# EAGLE board source_eagle (EAGLE 9.5.1)
REV: B
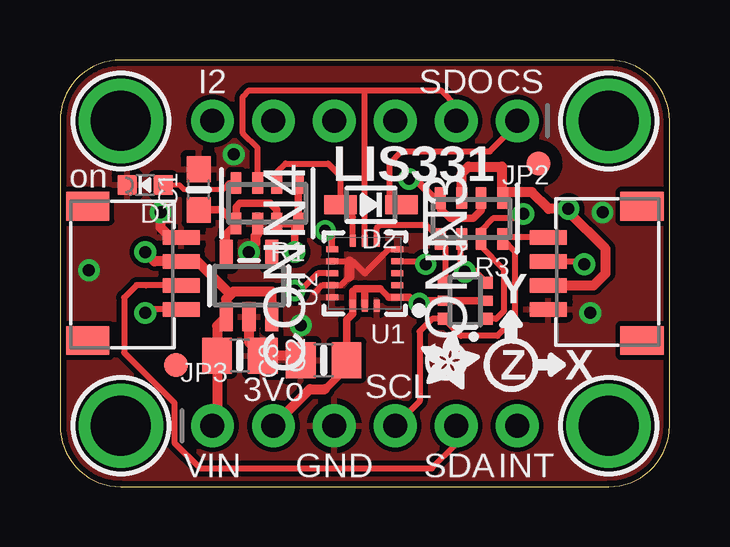
[diagram p0: board, top side]
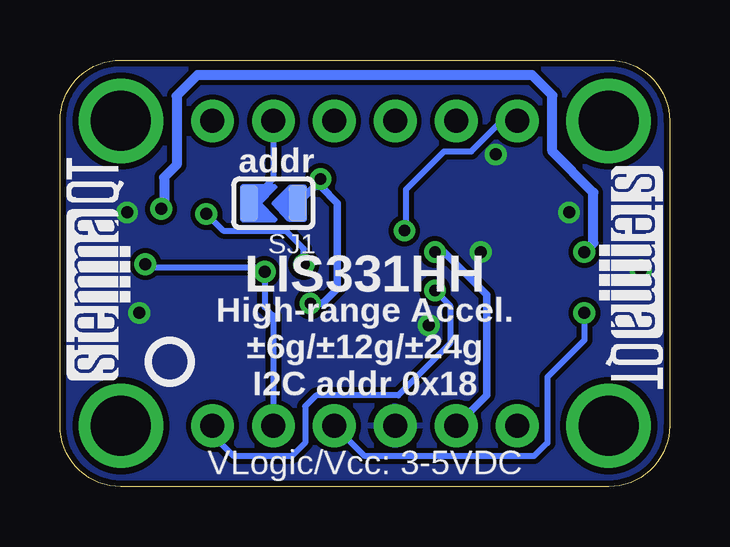
[diagram p1: board, bottom side, seen from below]

Size 25.4 x 17.78 mm. Coordinates in mm from the lower left corner, seen from the top.
Outline: 0,15.24 0,2.54 arc90 2.54,0 22.86,0 arc90 25.4,2.54 25.4,15.24 arc90 22.86,17.78 2.54,17.78 arc90 0,15.24
Copper layers (1*16): Top 0.035mm / dielectric 1.5mm / Bottom 0.035mm
Design rules "adafruit *": minimum track width 8mil, minimum drill 15.5mil, track to track 8mil, track to pad 8mil, pad to pad 8mil, via to via 8mil, smd to smd 8mil, copper to edge 10mil, drill to drill 8mil, minimum pad ring 10mil, minimum via ring 8mil, stop-mask expansion 2mil, vias tented up to drill 20mil, thermal gap 10mil
Net classes: 1 highpower: width 0.406 mm, drill 0.483 mm; 2 lowpower: width 0.305 mm, drill 0.483 mm

## Footprints (pad centres in the part's own frame; a part is rotated, then mirrored left to right if it is on the bottom)
0603-NO = smd 1.075 x 1: 1 -0.85,0; 2 0.85,0
0805-NO = smd 1.24 x 1.5: 1 -0.95,0; 2 0.95,0
JST_SH4 = smd 0.6 x 1.55: 1 -1.5,2.514; 2 -0.5,2.514; 3 0.5,2.514; 4 1.5,2.514 | smd 1.2 x 1.8: MT1 -2.8,-1.386; MT2 2.8,-1.386
CHIPLED_0603_NOOUTLINE = smd 0.8 x 0.8: A 0,-0.75; C 0,0.75
SOD-323 = smd 1.35 x 0.8: A 1.27,0; C -1.27,0
FIDUCIAL_1MM = smd 1 x 1: 1 0,0
1X06_ROUND_70 = drill 1 pad 1.778: 1 -6.35,0; 2 -3.81,0; 3 -1.27,0; 4 1.27,0; 5 3.81,0; 6 6.35,0
SOT363 = smd 0.5 x 0.5: 1 -0.75,-0.9; 3 0.75,-0.9; 4 0.75,0.9; 6 -0.75,0.9 | smd 0.4 x 0.5: 2 0,-0.9; 5 0,0.9
RESPACK_4X0603 = smd 0.45 x 0.9: 1 -1.3,-0.85; 2 -0.4,-0.85; 3 0.4,-0.85; 4 1.3,-0.85; 5 1.3,0.85; 6 0.4,0.85; 7 -0.4,0.85; 8 -1.3,0.85
SOLDERJUMPER_ARROW_NOPASTE = smd 0.762 x 1.524: 1 -1.016,0; 2 1.016,0
LGA16_3X3MM = smd 0.5 x 0.25: 1 -1.35,1; 2 -1.35,0.5; 3 -1.35,0; 4 -1.35,-0.5; 5 -1.35,-1; 9 1.35,-1; 10 1.35,-0.5; 11 1.35,0; 12 1.35,0.5; 13 1.35,1 | smd 0.25 x 0.5: 6 -0.5,-1.35; 7 0,-1.35; 8 0.5,-1.35; 14 0.5,1.35; 15 0,1.35; 16 -0.5,1.35
SOT23-5 = smd 0.55 x 1.2: 1 -0.95,-1.3; 2 0,-1.3; 3 0.95,-1.3; 4 0.95,1.3; 5 -0.95,1.3
MOUNTINGHOLE_2.5_PLATED = drill 2.5 pad 3.2: P$1 0,0

## Placement (x,y rotation side)
C1  0.1uF  [0603-NO]  5.78,12.38 90 top
C2  10uF  [0805-NO]  7.49,5.46 0 top
C3  10uF  [0805-NO]  10.99,5.27 180 top
CONN3  STEMMA_I2C_QT  [JST_SH4]  22.86,8.89 90 top
CONN4  STEMMA_I2C_QT  [JST_SH4]  2.54,8.89 270 top
D1  GREEN  [CHIPLED_0603_NOOUTLINE]  3.56,12.57 90 top
D2  1N4148  [SOD-323]  12.95,11.75 180 top
FID3  FIDUCIAL_1MM  [FIDUCIAL_1MM]  4.83,5.08 0 top
FID4  FIDUCIAL_1MM  [FIDUCIAL_1MM]  19.94,13.46 0 top
JP2  [1X06_ROUND_70]  12.7,15.24 180 top
JP3  [1X06_ROUND_70]  12.7,2.54 0 top
Q2  BSS138  [SOT363]  16.89,7.75 90 top
R1  10K  [RESPACK_4X0603]  8.64,11.81 180 top
R3  10K  [RESPACK_4X0603]  17.14,11.18 180 top
SJ1  [SOLDERJUMPER_ARROW_NOPASTE]  16.51,11.81 180 bottom
U1  LIS3DHTR  [LGA16_3X3MM]  12.7,8.89 180 top
U2  AP2112K-3.3  [SOT23-5]  7.87,8.38 0 top
U$1  MOUNTINGHOLE2.5  [MOUNTINGHOLE_2.5_PLATED]  2.54,15.24 0 top
U$12  [ADAFRUIT_2.5MM]  15.05,4.06 0 top
U$17  MOUNTINGHOLE2.5  [MOUNTINGHOLE_2.5_PLATED]  22.86,15.24 0 top
U$19  MOUNTINGHOLE2.5  [MOUNTINGHOLE_2.5_PLATED]  2.54,2.54 0 top
U$21  MOUNTINGHOLE2.5  [MOUNTINGHOLE_2.5_PLATED]  22.86,2.54 0 top
U$25  [PCBFEAT-REV-040]  20.83,5.21 0 bottom
U$30  [STEMMAQT]  22.48,4.45 90 bottom
U$31  [STEMMAQT]  2.92,13.34 270 bottom

## Library data of the parts
C1-C3 CONN3 CONN4 D1 D2 JP2 JP3 Q2 R1 R3 U1 U2 U$12 U$25 = microbuilder
FID3 FID4 SJ1 U$1 U$17 U$19 U$21 = microbuilder; BOM: EXCLUDE
U$30 U$31 = silks

## Nets
3.3V [lowpower]: C1.1 C3.1 JP3.2 Q2.2 Q2.5 R1.1 R1.5 R1.7 R1.8 R3.2 R3.4 SJ1.1 U1.1 U1.14 U1.15 U2.5
CS: D2.C JP2.1
GND [highpower]: C1.2 C2.2 C3.2 CONN3.1 CONN4.1 D1.C JP3.3 R1.6 U1.5 U1.10 U1.12 U1.13 U1.16 U2.2
INT1: JP3.6 U1.11
INT2: JP2.6 U1.9
N$1: D1.A R1.4
N$2: D2.A R1.2 U1.8
SCL: CONN3.4 CONN4.4 JP3.4 Q2.6 R3.8
SCL_3V: Q2.1 R3.7 U1.4
SDA: CONN3.3 CONN4.3 JP3.5 Q2.3 R3.6
SDA_3V: Q2.4 R3.5 U1.6
SDO: JP2.2 R1.3 SJ1.2 U1.7
VCC [highpower]: C2.1 CONN3.2 CONN4.2 JP3.1 R3.1 R3.3 U2.1 U2.3

## Tracks (layer width: path | path; a pad name or v marks a point on that pad's centre or on a via)
3.3V  (via drill 0.48)
  Top 0.254: 13.34,8.26 13.7,7.89
  Top 0.305: R3.2 17.55,11.51 17.21,11.18 16.26,11.18 15.85,11.59 R3.4 15.59,12.03 14.67,12.95 v14.54,12.83 | R1.5 7.29,10.96 6.72,11.53 C1.1 | U2.5 6.92,10.55 R1.5 | R1.5 7.34,11.65 7.49,11.81 8.76,11.81 9.04,11.54 R1.7 R1.8 | 12.7,8.26 12.32,8.26 12.2,8.14 U1.14 12.2,7.2 11.95,6.95 11.95,5.28 | 12.7,8.26 13.34,8.26 | 13.7,7.89 U1.1 14.56,7.89 14.81,7.64 v14.97,7.64 15.08,7.75 Q2.5 Q2.2 | R1.1 R1.8 | R1.8 9.78,10.8 v9.78,9.78 | 11.95,5.28 C3.1 | 11.05,4.06 11.95,4.96 11.95,5.28 | U1.15 12.7,8.26
  Top 0.406: JP3.2 10.41,4.06 11.05,4.06
  Bottom 0.305: v14.54,12.83 14.54,12.51 | 14.54,12.51 13.84,11.81 13.84,8.26 14.46,7.64 v14.97,7.64 | v9.78,9.78 9.4,9.78 7.62,8 7.62,3.81 JP3.2 | SJ1.1 14.8,12.51 14.54,12.51
CS
  Top 0.254: D2.C 13.91,11.75 13.72,11.94 13.72,13.46 14.22,13.97 17.91,13.97 19.05,15.11 JP2.1
GND  (via drill 0.5)
  Top 0.203: U1.5 13.7,9.89
  Top 0.254: 13.7,9.89 12.7,8.89 12.2,9.39 12.06,9.39 U1.10 | 12.06,8.76 11.69,8.39 U1.12 10.93,8.39 10.63,8.09
  Top 0.406: U2.2 7.87,6.03 C2.2 10.33,5.46 | CONN4.1 5,10.44 4.55,10.44 4.19,10.79 v4.19,11.43 | R1.6 8.24,10.54 8.14,10.45 8.14,10.18 7.87,9.91 | 12.06,8.76 12.06,9.39
  other vias: 22.1,7.24 7.24,13.84 7.87,9.78 22.61,11.43 10.03,6.73 1.21,9.02
  pour Top: 0,17.78 25.4,17.78 25.4,0 0,0
  pour Bottom: 0,17.78 25.4,17.78 25.4,0 0,0
INT1  (via drill 0.48)
  Top 0.254: U1.11 10.74,8.89 10.03,8.18 v9.78,8.18
  Bottom 0.254: v9.78,8.18 9.14,7.54 9.14,5.97 11.3,3.81 14.73,3.81 15.19,3.35 15.19,1.83 15.75,1.27 18.16,1.27 19.05,2.16 JP3.6
INT2  (via drill 0.48)
  Top 0.254: U1.9 11.35,10.37 v11.05,10.67
  Bottom 0.254: JP2.6 6.99,15.24 8.26,13.97 9.4,13.97 10.99,12.38 10.99,10.73 v11.05,10.67
N$1
  Top 0.203: D1.A 4.97,12.57 5.15,12.39 6.8,12.39 6.99,12.57
  Top 0.254: 6.99,12.57 7.07,12.66 R1.4
N$2
  Top 0.254: U1.8 12.2,11.23 D2.A 11.68,12.95 11.18,13.46 9.4,13.46 9.04,13.1 R1.2
SCL  (via drill 0.5)
  Top 0.254: CONN3.4 18.51,10.39 R3.8 18.95,9.82 18.95,7.01 18.22,6.29 16.7,6.29 Q2.6 | CONN4.4 3.71,7.39 v3.56,7.24 | Q2.6 | Q2.6 15.51,7 14.99,6.48 14.99,3.56 JP3.4
  Bottom 0.254: JP3.4 12.7,1.27 5.65,1.27 5.09,1.83 5.09,4.57 3.56,6.11 v3.56,7.24
SCL_3V  (via drill 0.48, 0.5)
  Top 0.254: v19.3,11.37 19.11,11.18 18.03,11.18 17.55,10.69 R3.7 17.55,10.01 18.5,9.06 18.5,7.32 18.17,7 Q2.1 | v15.24,9.27 15.12,9.39 U1.4
  Bottom 0.254: v19.3,11.37 18.61,10.67 16,10.67 15.24,9.91 v15.24,9.27
SDA  (via drill 0.5)
  Top 0.254: R3.6 16.68,10.26 16.68,9.18 16.87,8.99 v16.87,8.95 16.92,9.01 17.28,9.01 Q2.3 | CONN4.3 3.58,8.39 3.58,8.4 3.2,8.4 2.67,7.87 2.67,5.59 4.76,3.49 4.76,1.84 5.84,0.76 15.49,0.76 16.51,1.78 JP3.5 | CONN3.3 21.73,9.39 v21.84,9.27
  Bottom 0.254: v21.84,9.27 21.72,9.14 17.06,9.14 v16.87,8.95 16.87,7.49 16.51,7.13 JP3.5
SDA_3V
  Top 0.254: Q2.4 16.05,8.56 16.05,9.96 15.85,10.17 R3.5 15.25,10.92 13.34,10.92 13.2,10.79 U1.6
SDO
  Top 0.254: R1.3 8.24,14.12 7.62,14.73 7.62,16.26 7.87,16.51 12.7,16.51 | U1.7 12.7,16.51 | 12.7,16.51 15.88,16.51 16.51,15.88 JP2.2
  Bottom 0.254: JP2.2 16.51,12.83 SJ1.2
VCC  (via drill 0.5)
  Top 0.406: R3.3 16.75,13.06 17.02,13.34 18.41,13.34 18.41,12.06 R3.1 18.7,12.28 19.66,12.28 20.36,11.58 v21.18,11.58 21.18,11.45 22.73,9.91 22.73,8.89 22.23,8.39 CONN3.2 | U2.3 8.82,8.13 7.24,8.13 7.11,8 | 7.11,8 6.92,7.81 U2.1 6.54,6.7 C2.1 6.54,2.73 JP3.1 | 7.11,8 5.73,9.39 CONN4.2 3.94,9.39 v3.56,9.78
  Bottom 0.406: v21.18,11.58 21.06,11.71 21.06,12.89 20.54,13.41 20.54,16.29 19.68,17.14 5.72,17.14 4.89,16.31 4.89,13.97 3.17,12.26 3.17,10.16 v3.56,9.78

## Text on the board
tPlace: I2 | SDO | CS | LIS331 | on | Y | Z | X | 3Vo | SCL | VIN | GND | SDA | INT
bPlace: addr | LIS331HH | High-range Accel. / ±6g/±12g/±24g / I2C addr 0x18 | VLogic/Vcc: 3-5VDC